# Altium PCB Multivibrator.PcbDoc
Units mm, origin at the board's own origin, x right, y up, seen from the top; angles counter-clockwise.
Board outline 50 x 50 mm, 2 copper layers (Top Layer, Bottom Layer); 9 components, 6 nets, 20 pads, 0 vias.
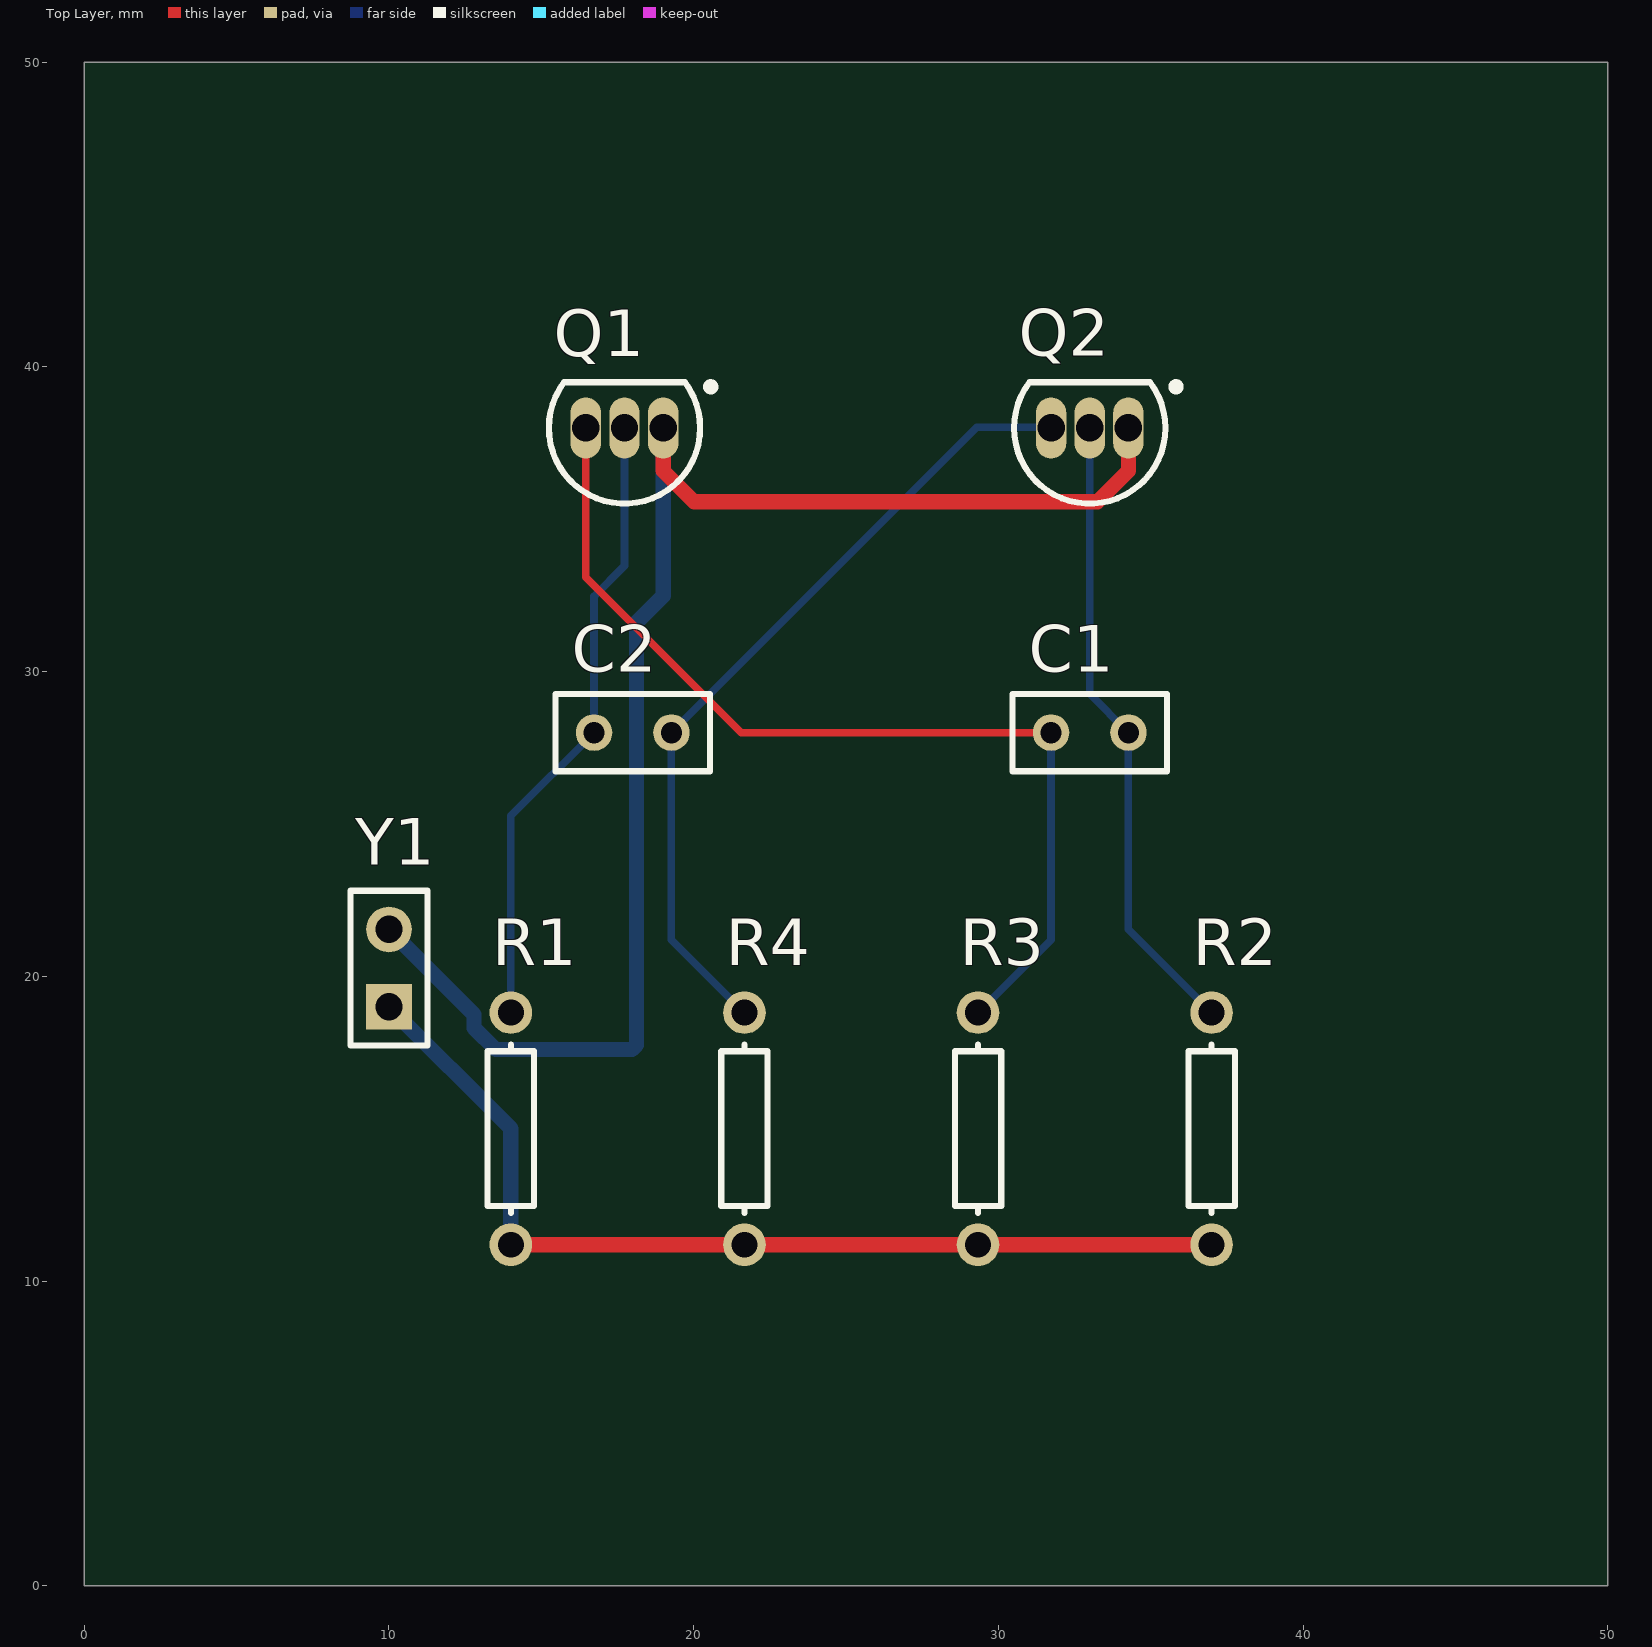
[diagram p0: Top Layer view]
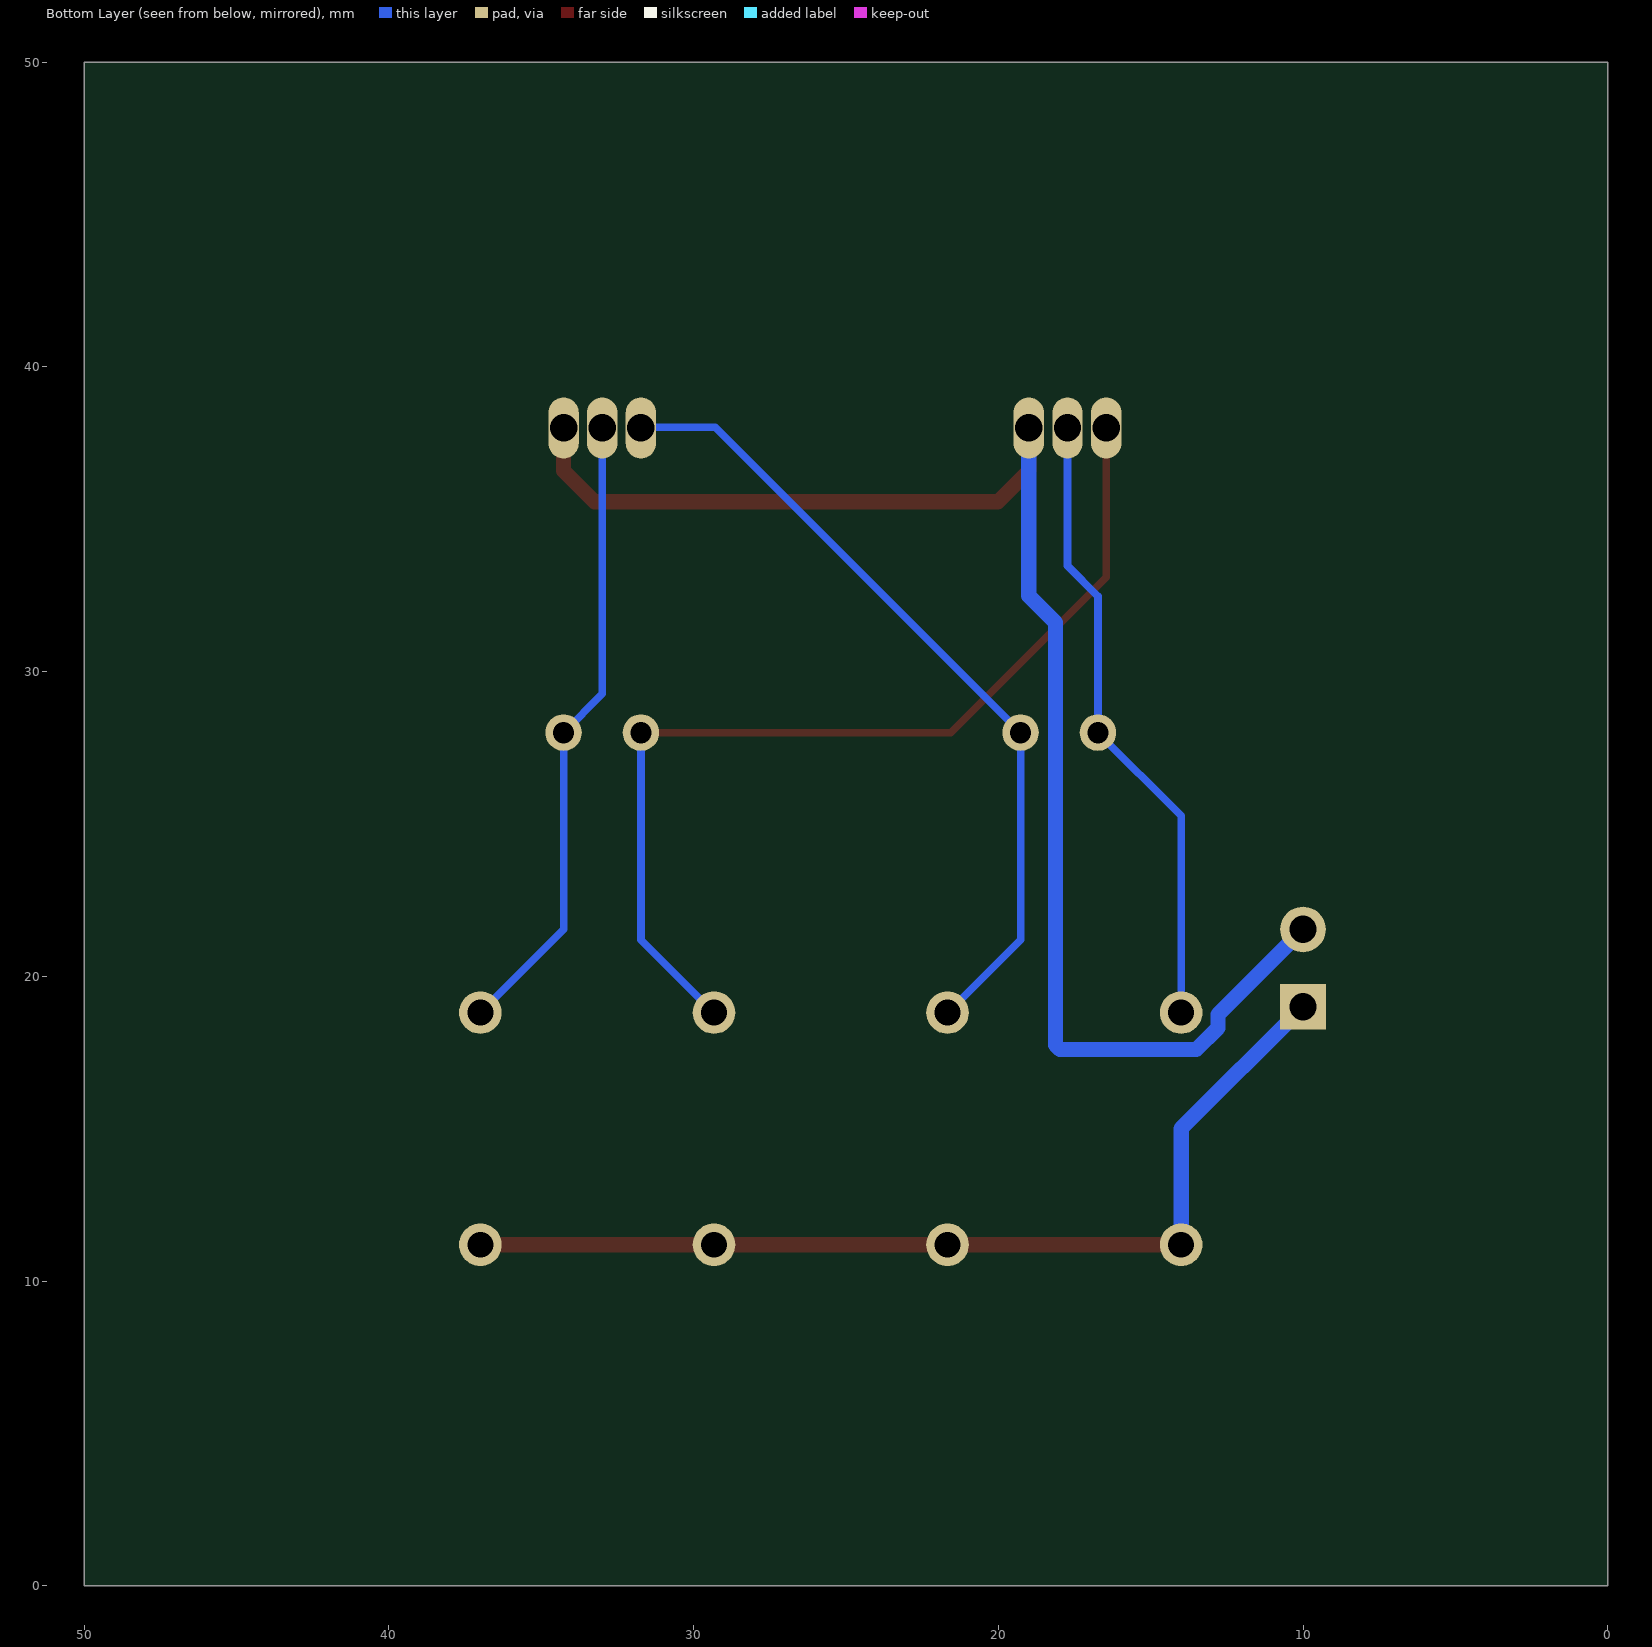
[diagram p1: Bottom Layer view, seen from below]

## Layer stack, top to bottom
Top Solder: solder mask 0.01, Solder Resist, Dk 3.5
Top Layer: signal copper 0.035
Dielectric1: dielectric 0.32, FR-4, Dk 4.8
Bottom Layer: signal copper 0.035
Bottom Solder: solder mask 0.01, Solder Resist, Dk 3.5

## Board outline
0,0 0,50 50,50 50,0

## Design rules (kind name [scope] priority, off if disabled: settings)
Clearance [All] p1: gap=0.25 ignorepadtopadclearanceinfootprint=FALSE
FabricationTestPointUsage TestPointUsage [All] p1: valid=0 allowmultiple=FALSE
FabricationTestpoint Testpoint [All] p1: side=3 testpointundercomponent=TRUE minsize=1.016 maxsize=2.54 preferedsize=1.524 minholesize=0 maxholesize=1.016 preferedholesize=0.813 testpointgrid=0.025 allowsidetop=TRUE allowsidebottom=TRUE usegrid=TRUE gridtolerance=0
MinimumSolderMaskSliver [All] p1: minsoldermaskwidth=0.125
PolygonConnect [All] p1: connectstyle=Relief reliefconductorwidth=0.254 reliefentries=4 polygonreliefangle="90 Angle" airgapwidth=0.254
RoutingVias [All] p1: holewidth=0.6 width=1 viastyle="Through Hole" minholewidth=0.6 minwidth=1 maxholewidth=0.6 maxwidth=1
SilkToSolderMaskClearance SilkscreenOverComponentPads [IsPad] p1: minsilkscreentomaskgap=0.125 clearancetoexposedcopper=TRUE
SolderMaskExpansion SolderMaskExpansion_TO-92A [HasFootprint('TO-92A')] p1: expansion=0.07
SolderMaskExpansion [All] p2: expansion=0.102
Width Width_Power [(InNet('12V') OR InNet('GND'))] p1: maxlimit=0.5 minlimit=0.25 preferedwidth=0.5
Width [All] p2: maxlimit=0.25 minlimit=0.25 preferedwidth=0.25
26 further rules are at their usual default settings.

## Components (designator, comment, footprint, x,y, rotation, side; value= is the part's Value field where it differs from the comment)
C1 "20nF" RAD-0.1 33,28 r0 top
C2 "20nF" RAD-0.1 18,28 r0 top
Q1 "2N3904" TO-92A 17.73,38 r90 top
Q2 "2N3904" TO-92A 33,38 r90 top
R1 "100k" AXIAL-0.3 14,15 r270 top
R2 "100k" AXIAL-0.3 37,15 r270 top
R3 "1k" AXIAL-0.3 29.333,15 r270 top
R4 "1k" AXIAL-0.3 21.667,15 r270 top
Y1 "Header 2" HDR1X2 10,19 r90 top

## Footprints (in the part's own frame and the unit in brackets; to place one, negate y for a bottom-side part, rotate by r counter-clockwise, add the part's x,y. Pads: shape width x height; smd on the part's side, far side on the other; paste and mask are expansions set on the pad)
AXIAL-0.3 [mm] "Axial Device, Thru-Hole; 2 Leads; 0.3 in Pin Spacing"
  round 1.4 hole 0.85: 1(-3.81,0) 2(3.81,0)
  silkscreen extent -2.77,-0.76 2.77,0.76
HDR1X2 [mm] "Connector; Header; 2 Position"
  rect 1.5x1.5 hole 0.9: 1(0,0)
  round 1.5 hole 0.9: 2(2.54,0)
  silkscreen extent -1.27,-1.27 3.81,1.27
RAD-0.1 [mm] "Radial Cap, Thru-Hole; 2 Leads; 0.1 in Pin Spacing"
  round 1.2 hole 0.7: 1(-1.27,0) 2(1.27,0)
  silkscreen extent -2.54,-1.27 2.54,1.27
TO-92A [mm] "TO, Flat Index; 3 In-Line, Axial Leads; Body Dia. 4.5mm; Leads 0.51 x 0.48 mm (max)"
  oval 2x1 hole 0.9: 1(0,-1.27) 2(0,0) 3(0,1.27)
  silkscreen extent -2.48,-2.96 1.5,2.48, body extent -2.48,-2.5 1.5,2.5, height 6.86

## Part data
C1 C2: library part Cap, "Capacitor", LatestRevisionDate=17-Jul-2002, LatestRevisionNote="Re-released for DXP Platform.", PackageDescription="Radial Cap, Thru-Hole; 2 Leads; 0.3 in Pin Spacing", PackageReference=RAD-0.3, Published=8-Jun-2000, Publisher="Altium Limited"
Q1 Q2: "NPN General Purpose Amplifier", ComponentLink1Description="Manufacturer Link", ComponentLink1URL=http://www.fairchildsemi.com/, ComponentLink2Description=Datasheet, ComponentLink2URL=http://www.fairchildsemi.com/ds/2N%2F2N3904.pdf, DatasheetVersion=1997, LatestRevisionDate=15-Jan-2003, LatestRevisionNote="PCB Footprint 'BCY-W3/D4.7' replaced", PackageDescription="TO, Flat Index; 3 In-Line, Axial Leads; Body Dia. 4.5mm; Leads 0.51 x 0.48 mm (max)", PackageReference=TO-92A, PackageVersion=Sep-1998, Published=8-Jun-2000, Publisher="Altium Limited"
R1 R2 R3 R4: library part Res1, "Resistor", LatestRevisionDate=17-Jul-2002, LatestRevisionNote="Re-released for DXP Platform.", PackageDescription="Axial Device, Thru-Hole; 2 Leads; 0.3 in Pin Spacing", PackageReference=AXIAL-0.3, Published=8-Jun-2000, Publisher="Altium Limited"
Y1: "Header, 2-Pin", LatestRevisionDate=17-Jul-2002, LatestRevisionNote="Re-released for DXP Platform.", Publisher="Altium Limited"

## Nets (pads, with @x,y where several pads share a name; then routed paths per layer and width w, separated by ;. In a path a pad name is that pad's centre, name@x,y a point inside that pad or via, vN(x,y) a via of type N, cw(c..) or ccw(c..) an arc to the next point about the centre after c; other vN are vias at no path point)
12V: R1.2 R2.2 R3.2 R4.2 Y1.1 | length 32.5
  Top Layer w0.5: R1.2 R4.2 R3.2 R2.2
  Bottom Layer w0.5: Y1.1 14,15 R1.2
GND: Q1.1 Q2.1 Y1.2 | length 49.6
  Top Layer w0.5: Q1.1 19,36.594 20.016,35.578 33.254,35.578 34.27,36.594 Q2.1
  Bottom Layer w0.5: Y1.2 12.793,18.747 12.793,18.306 13.504,17.595 17.974,17.595 18.127,17.747 18.127,31.616 19,32.489 Q1.1
NetC1_1: C1.1 Q1.3 R3.1 | length 32.5
  Top Layer w0.25: Q1.3 16.46,33.104 21.564,28 C1.1
  Bottom Layer w0.25: R3.1 31.73,21.207 C1.1
NetC1_2: C1.2 Q2.2 R2.1 | length 20.8
  Bottom Layer w0.25: Q2.2 33,29.27 C1.2 34.27,21.54 R2.1
NetC2_1: C2.1 Q1.2 R1.1 | length 20.7
  Bottom Layer w0.25: R1.1 14,25.27 C2.1 16.73,32.479 17.73,33.479 Q1.2
NetC2_2: C2.2 Q2.3 R4.1 | length 26.8
  Bottom Layer w0.25: R4.1 19.27,21.207 C2.2 29.286,38.016 31.73,38.016 Q2.3

## Silkscreen, mask and mechanical layers (free items; w line width, h text height)
Mechanical 16:
  drawing of 1874 lines, arcs and shapes, not listed
  text "1" at -84.286,118.509 h1.78
  text "2" at -11.642,118.509 h1.78
  text "3" at 61.51,118.509 h1.78
  text "4" at 134.408,118.509 h1.78
  text "A" at -118.627,95.497 h1.78
  text "A" at 168.393,95.497 h1.78
  text "B" at -118.627,47.44 h1.78
  text "B" at 168.393,47.44 h1.78
  text "C" at -118.627,-1.074 h1.78
  text "C" at 168.393,-1.074 h1.78
  text "ENGINEER:" at 53.458,-38.082 h1.14
  text "TITLE:" at 91.558,-38.082 h1.14
  text "PCB DESIGNER:" at 53.458,-45.575 h1.14
  text "D" at -118.627,-49.08 h1.78
  text "D" at 168.393,-49.08 h1.78
  text "DATE:" at 53.458,-53.322 h1.14
  text "PART NO.:" at 91.558,-53.322 h1.14
  text "REV:" at 144.898,-53.322 h1.14
  text "Altium Limited" at 20.438,-55.862 h1.78
  text ".PRINT_DATE" at 54.728,-56.37 h1.78
  text "12a Rodborough Rd" at 20.438,-58.402 h1.78
  text "Frenchs Forest" at 20.438,-60.942 h1.78
  text "FILE NAME:" at 53.458,-60.942 h1.14
  text "DWG NO:" at 91.558,-60.942 h1.14
  text "SCALE:" at 144.898,-60.942 h1.14
  text "NSW 2086" at 20.438,-63.482 h1.78
  text ".PCB_FILE_NAME_NO_PATH" at 54.728,-63.99 h1.78
  text "1" at -84.286,-69.451 h1.78
  text "2" at -11.642,-69.451 h1.78
  text "3" at 61.51,-69.451 h1.78
  text "4" at 134.408,-69.451 h1.78